# Altium PCB PCB1.PcbDoc
Units mm, origin at the board's own origin, x right, y up, seen from the top; angles counter-clockwise.
Board outline 39.55 x 34.49 mm, 2 copper layers (Top Layer, Bottom Layer); 28 components, 18 nets, 126 pads, 0 vias.
Unrouted connection lines stored in the file: 69.
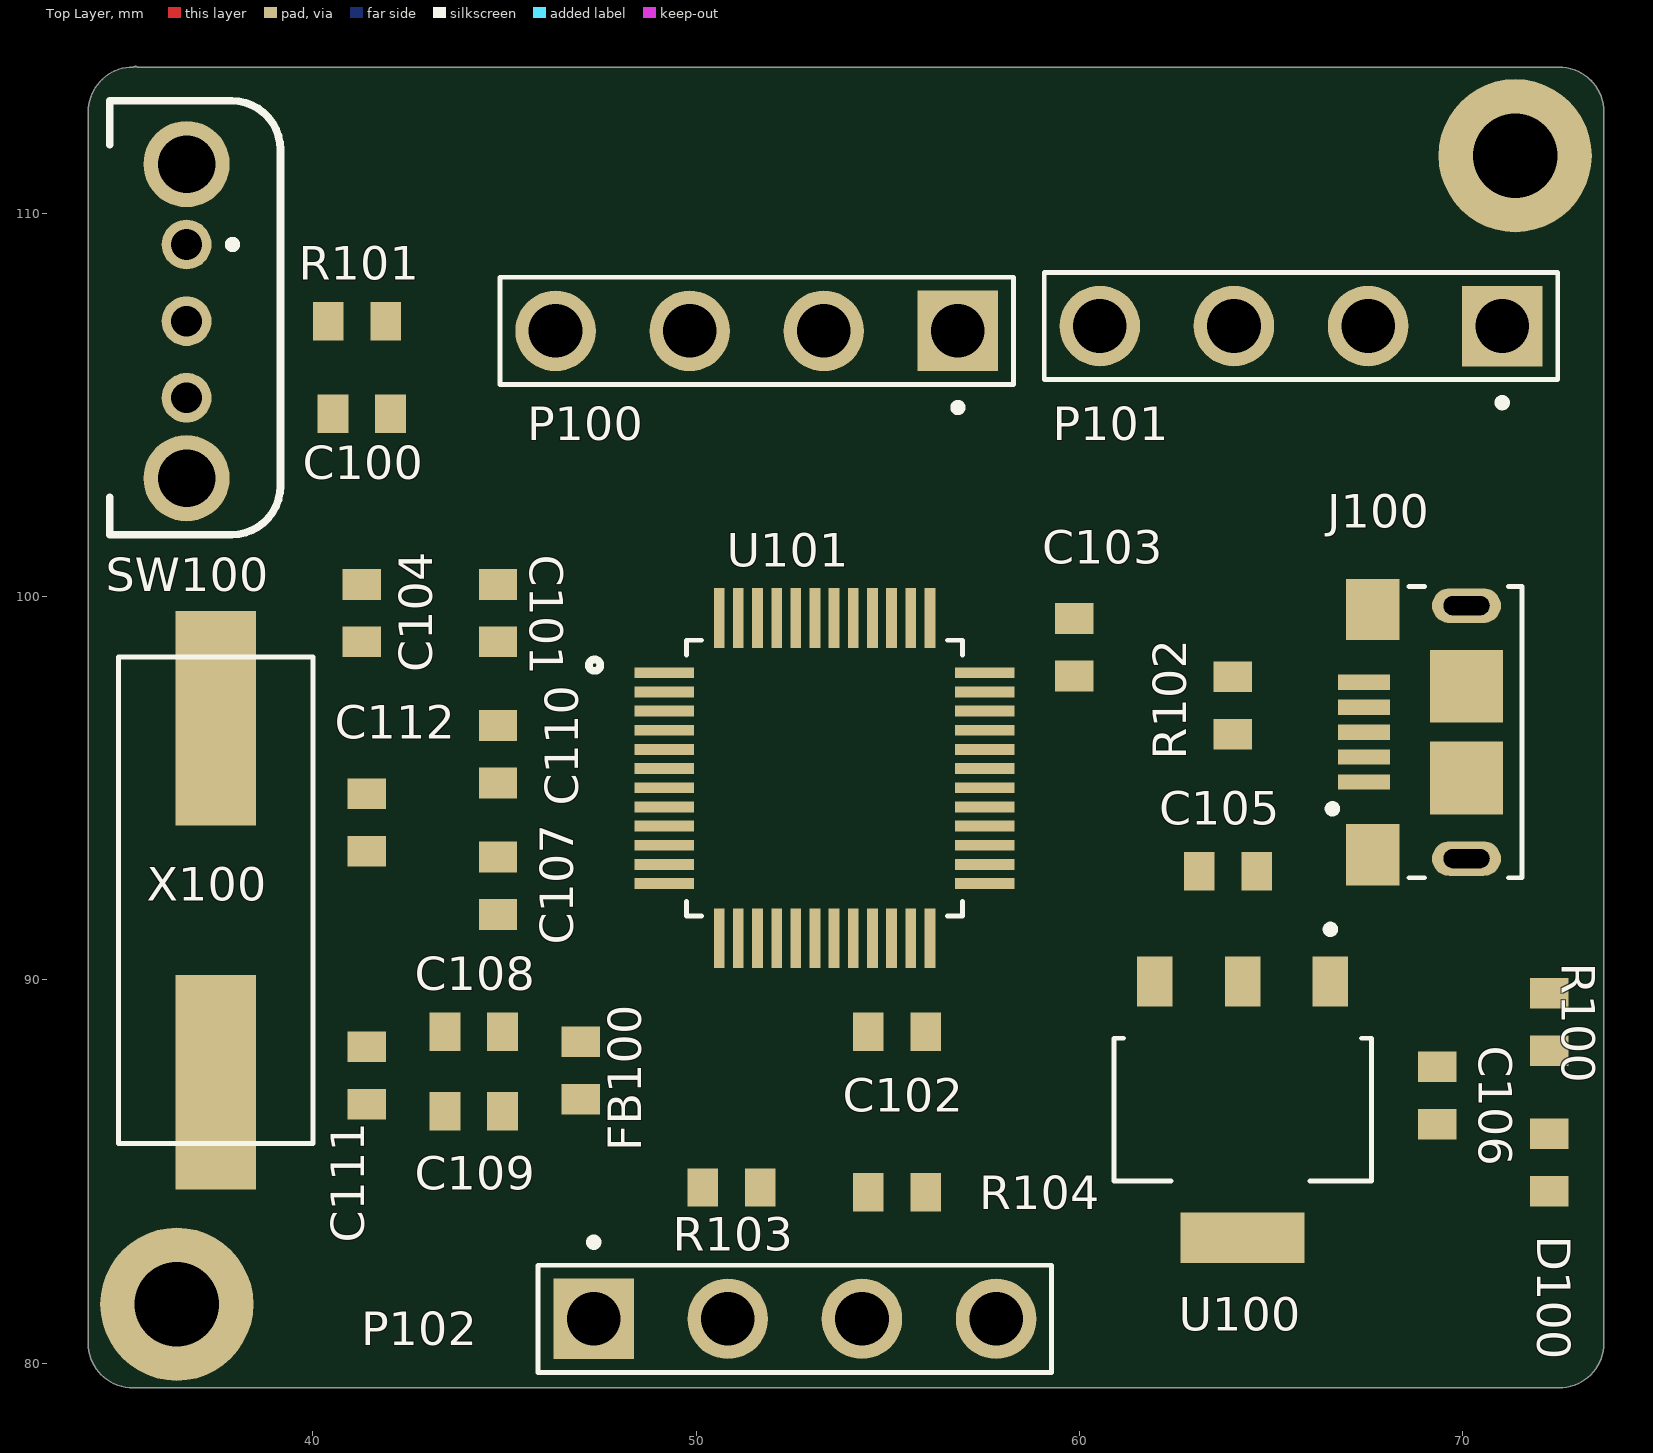
[diagram p0: Top Layer view]
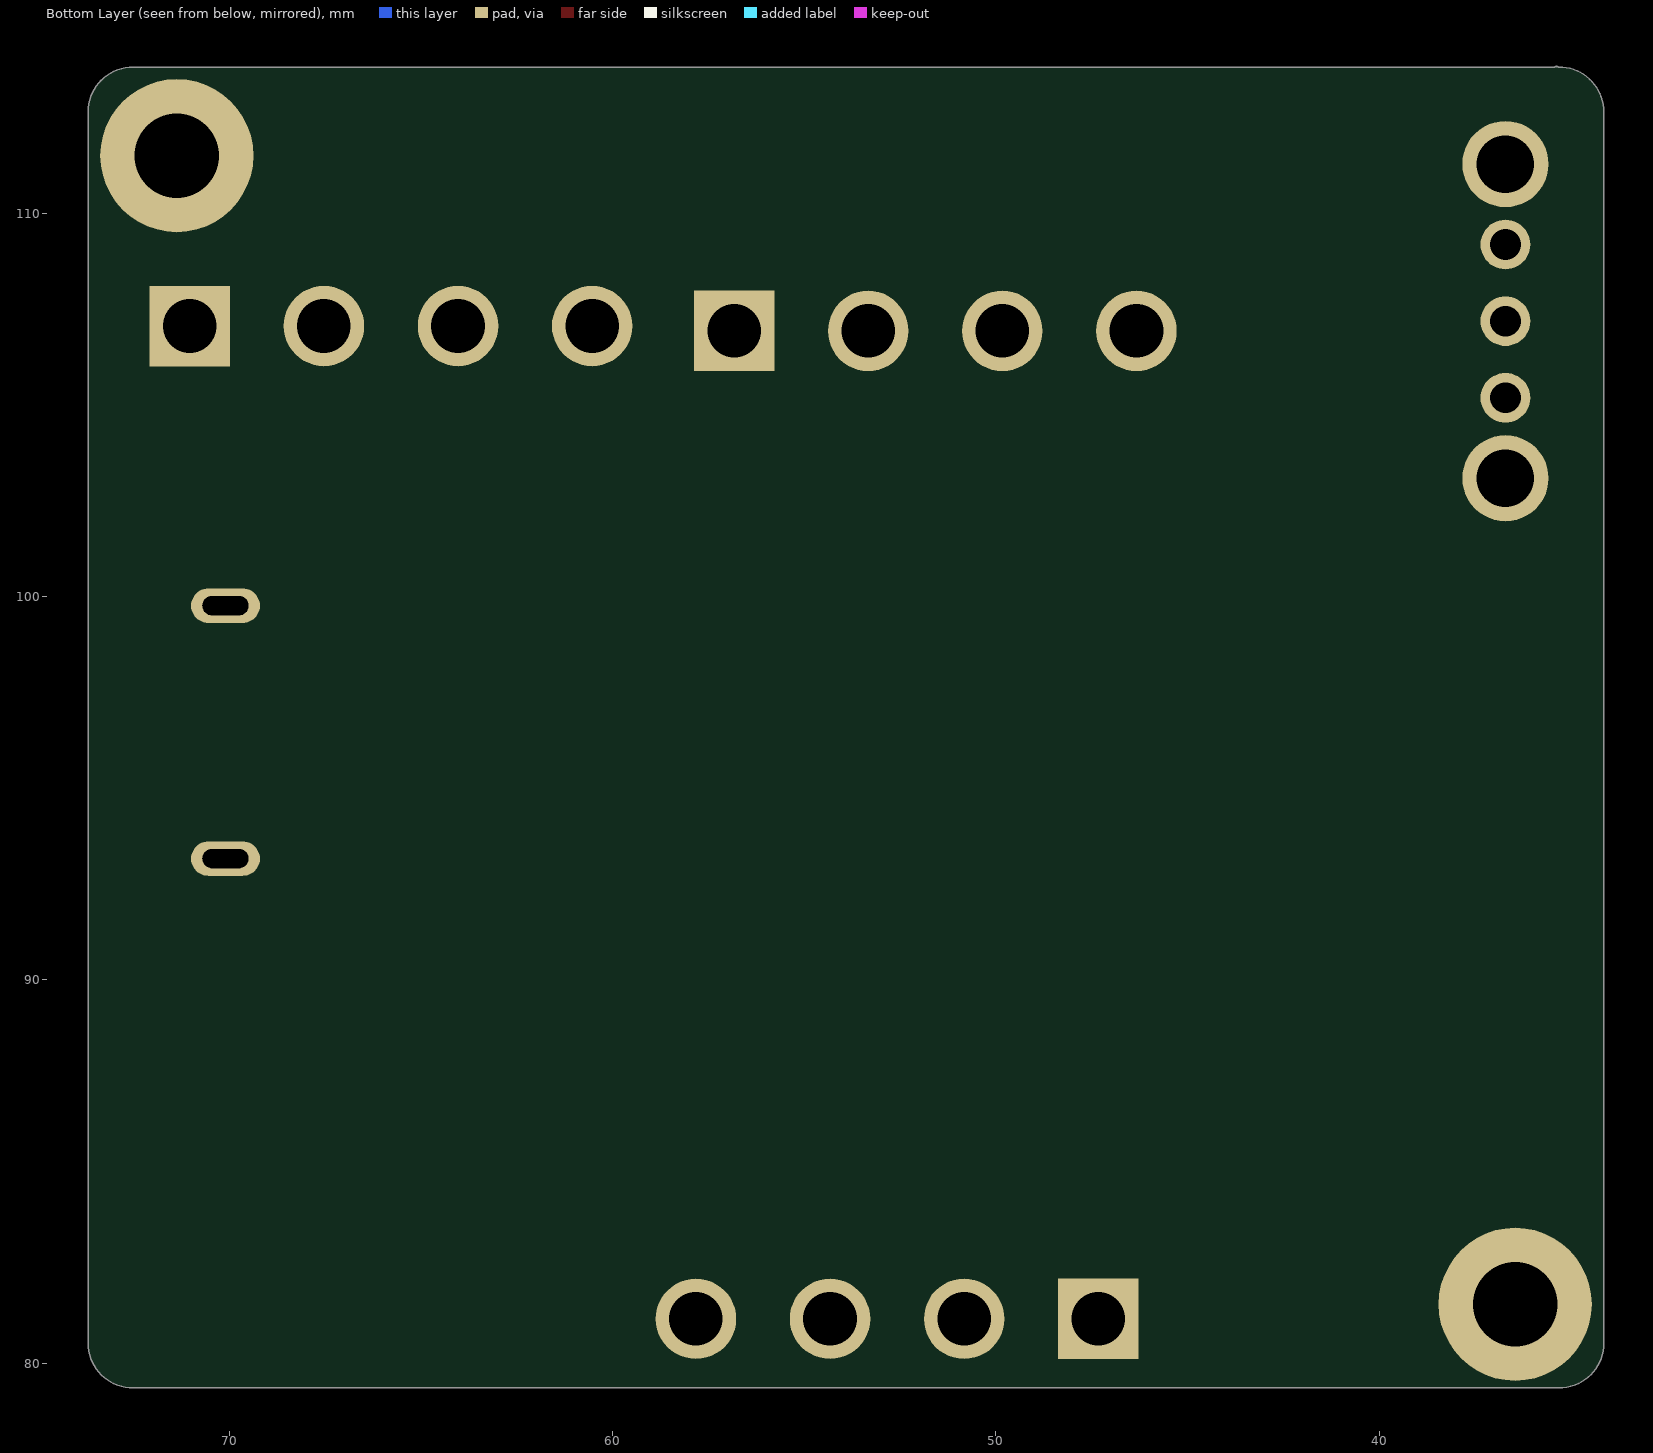
[diagram p1: Bottom Layer view, seen from below]

## Layer stack, top to bottom
Top Solder: solder mask 0.0102, Solder Resist, Dk 3.5
Top Layer: signal copper 0.0356
Dielectric 1: dielectric 0.32, FR-4, Dk 4.8
Bottom Layer: signal copper 0.0356
Bottom Solder: solder mask 0.0102, Solder Resist, Dk 3.5

## Board outline
35.306,79.348 cw(c35.306,80.518) 34.136,80.517 cw(c34.429,80.518) 34.136,80.518 34.136,112.649 cw(c35.306,112.649) 35.306,113.819 ccw(c35.306,113.919) 35.369,113.841 ccw(c35.433,113.919) 35.433,113.819 72.517,113.819 cw(c72.517,112.649) 73.687,112.651 cw(c72.509,112.649) 73.687,112.649 73.687,112.651 73.687,80.518 cw(c72.517,80.518) 72.517,79.348 35.307,79.348 ccw(c35.306,79.248)

## Design rules (kind name [scope] priority, off if disabled: settings)
Clearance [All] p1: gap=0.152 ignorepadtopadclearanceinfootprint=FALSE except(0: Arc-Text Track-Text SMDPad-Text THPad-Text Via-Text Fill-Text Poly-Text Region-Text Text-Text)
PolygonConnect [All] p1: connectstyle=Relief reliefconductorwidth=0.254 reliefentries=4 polygonreliefangle="90 Angle" airgapwidth=0.254
RoutingVias [All] p1: holewidth=0.5 width=0.8 viastyle="Through Hole" minholewidth=0.3 minwidth=0.5 maxholewidth=1 maxwidth=2
SolderMaskExpansion [All] p1: expansion=0.102 istentingtop=FALSE
Width [All] p1: maxlimit=3 minlimit=0.15 preferedwidth=0.15
30 further rules are at their usual default settings.

## Classes and differential pairs
component class Sheet1: C100 C101 C102 C103 C105 C106 C107 C108 C109 C110 C111 C112 D100 FB100 J100 P100 P101 P102 R100 R101 R102 R103 R104 SW100 X100

## Components (designator, comment, footprint, x,y, rotation, side; value= is the part's Value field where it differs from the comment)
C100 "100n" CAP_0603 41.275,104.775 r0 top
C101 "100n" CAP_0603 44.831,99.568 r90 top
C102 "100n" CAP_0603 55.245,88.646 r180 top
C103 "100n" CAP_0603 59.869,98.679 r90 top
C104 "100n" CAP_0603 41.275,99.568 r90 top
C105 "22u" CAP_0603 63.881,92.837 r0 top
C106 "22u" CAP_0603 69.342,86.983 r90 top
C107 "10n" CAP_0603 44.831,92.456 r90 top
C108 "1u" CAP_0603 44.196,88.646 r180 top
C109 "1u" CAP_0603 44.196,86.567 r180 top
C110 "100n" CAP_0603 44.831,95.885 r90 top
C111 "10p" CAP_0603 41.402,87.503 r90 top
C112 "10p" CAP_0603 41.402,94.107 r270 top
D100 "RED" LED_0603_RED 72.263,85.229 r90 top
FB100 "120R" FB_0603 46.99,87.63 r270 top
J100 "USB_B_Micro" USB_B_MICRO 68.766,96.463 r90 top
P100 "Terminal_Block_Header_1" HEADER_4 51.582,106.934 r180 top
P101 "Terminal_Block_Header_1" HEADER_4 65.786,107.061 r180 top
P102 "Terminal_Block_Header_1" HEADER_4 52.578,81.153 r0 top
R100 "1k5" RES_0603 72.263,88.9 r270 top
R101 "10k" RES_0603 41.148,107.188 r0 top
R102 "1k5" RES_0603 64.008,97.155 r90 top
R103 "1k5" RES_0603 50.927,84.582 r180 top
R104 "1k5" RES_0603 55.245,84.455 r0 top
SW100 "Switch" SWITCH 36.703,107.188 r270 top
U100 "Linear Voltage Regulator" AMS1117 64.262,86.614 r270 top
U101 "U?" STM32F103C8TX 53.351,95.262 r0 top (schematic designator STM100)
X100 "16MHz" "Crystal 8MHZ" 37.465,92.075 r90 top

## Footprints (in the part's own frame and the unit in brackets; to place one, negate y for a bottom-side part, rotate by r counter-clockwise, add the part's x,y. Pads: shape width x height; smd on the part's side, far side on the other; paste and mask are expansions set on the pad)
AMS1117 [mm]
  rect 1.31x0.93 smd mask+0.005: 1(-3.345,2.29) 2(-3.345,0) 3(-3.345,-2.29)
  rect 1.31x3.24 smd mask+0.005: 4(3.345,0)
  silkscreen extent -4.8,-3.36 1.86,3.36, body extent -3.4,-3.3 3.6,3.2, height 1.81
CAP_0603 [mm]
  rect 0.8x1 smd: 1(0.75,0) 2(-0.75,0)
  body extent -0.76,-0.4 0.84,0.4, height 0.47
"Crystal 8MHZ" [mil]
  rect 220x83 smd mask+1.97: 1(187,0) 2(-187,0)
  silkscreen extent -250,-100 250,100, body extent -250,-92 250,93, height 160
FB_0603 [mm]
  rect 0.8x1 smd: 1(-0.75,0) 2(0.75,0)
  body extent -0.8,-0.4 0.8,0.4, height 0.81
HEADER_4 [mm]
  rect 2.1x2.1 hole 1.4: 1(-5.25,0)
  round 2.1 hole 1.4: 2(-1.75,0) 3(1.75,0) 4(5.25,0)
  silkscreen extent -6.7,-1.4 6.7,2.1, body extent -6.67,-1.4 6.73,1.4, height 7
LED_0603_RED [mm]
  rect 0.8x1 smd: A(0.75,0) K(-0.75,0)
  body extent -0.8,-0.4 0.8,0.4, height 0.6
RES_0603 [mm]
  rect 0.8x1 smd: 1(-0.75,0) 2(0.75,0)
  body extent -0.8,-0.43 0.8,0.43, height 0.52
STM32F103C8TX [mm]
  rect 1.56x0.28 smd mask+0.005: 1(-4.18,2.75) 2(-4.18,2.25) 3(-4.18,1.75) 4(-4.18,1.25) 5(-4.18,0.75) 6(-4.18,0.25) 7(-4.18,-0.25) 8(-4.18,-0.75) 9(-4.18,-1.25) 10(-4.18,-1.75) 11(-4.18,-2.25) 12(-4.18,-2.75) 25(4.18,-2.75) 26(4.18,-2.25) 27(4.18,-1.75) 28(4.18,-1.25) 29(4.18,-0.75) 30(4.18,-0.25) 31(4.18,0.25) 32(4.18,0.75) 33(4.18,1.25) 34(4.18,1.75) 35(4.18,2.25) 36(4.18,2.75)
  rect 0.28x1.56 smd mask+0.005: 13(-2.75,-4.18) 14(-2.25,-4.18) 15(-1.75,-4.18) 16(-1.25,-4.18) 17(-0.75,-4.18) 18(-0.25,-4.18) 19(0.25,-4.18) 20(0.75,-4.18) 21(1.25,-4.18) 22(1.75,-4.18) 23(2.25,-4.18) 24(2.75,-4.18) 37(2.75,4.18) 38(2.25,4.18) 39(1.75,4.18) 40(1.25,4.18) 41(0.75,4.18) 42(0.25,4.18) 43(-0.25,4.18) 44(-0.75,4.18) 45(-1.25,4.18) 46(-1.75,4.18) 47(-2.25,4.18) 48(-2.75,4.18)
  silkscreen extent -6.15,-3.6 3.6,3.6, body extent -4.5,-4.5 4.5,4.5, height 1.57
SWITCH [mm]
  round 1.3 hole 0.8: 1(-2,0) 2(0,0) 3(2,0)
  round 2.25 hole 1.5: MH(-4.1,0) MH(4.1,0)
  silkscreen extent -5.75,-2 5.57,2.45, body extent -4.3,-6.22 4.3,2.18, height 4.59
USB_B_MICRO [mm]
  rect 0.4x1.35 smd: 1(-1.3,1.338) 2(-0.65,1.338) 3(0,1.338) 4(0.65,1.338) 5(1.3,1.338)
  rect 1.6x1.4 smd: S1(-3.2,1.112) S2(3.2,1.112)
  rect 1.9x1.9 smd: S3(1.2,-1.338) S4(-1.2,-1.338)
  oval 0.9x1.8 hole 0.5 slot 1.2 at 90 deg: S5(-3.3,-1.338) S6(3.3,-1.338)
  round 0.5 hole 0.5 unplated: ""(-3.3,-1.338) ""(3.3,-1.338)
  silkscreen extent -3.8,-2.79 3.8,2.26, body extent -3.87,-4.05 3.99,1.66, height 2.85

## Part data
C100 C101 C102 C103 C104 C105 C106 C107 C108 C109 C110 C111 C112: library part CAP_0603_10V, "Capacitor SMD 0603 10V"
D100: library part LED_0603_RED, "LED 0603 RED SMD"
FB100: library part FB_0603, "Ferrite Bead SMD 0603"
P100 P101 P102: "4 pin Male"
R100 R101 R102 R103 R104: library part RES_0603, "Resistor SMD 0603"
U100: library part AMS1117, "IC-1117 V.REG. 1A 3V3 SOT223 SMD AMS"
U101: library part STM32F103C8TX, "IC MCU 32BIT 64KB FLASH 48LQFP", Case/Package=LQFP, Frequency=72MHz, Manufacturer=STMicroelectronics, Manufacturer Part Number=STM32F103C8T6, Max Operating Temperature=85°C, Max Power Dissipation=363mW, Max Supply Voltage=3.6V, Min Operating Temperature=-40°C, Min Supply Voltage=2V, Package Quantity=1500, Supplier Part Number 1=1447637, Address Bus Width=32b, Category=Microcontrollers, ComponentLink1Description=https://datasheet.ciiva.com/15122/getdatasheetpartid-69880-15122076.pdf?src-supplier=Verical, ComponentLink1URL=https://datasheet.ciiva.com/15122/getdatasheetpartid-69880-15122076.pdf?src-supplier=Verical, ComponentLink2Description=https://datasheet.ciiva.com/8054/1730126-8054942.pdf?src-supplier=Element14, ComponentLink2URL=https://datasheet.ciiva.com/8054/1730126-8054942.pdf?src-supplier=Element14, ComponentLink3Description=https://datasheet.ciiva.com/14100/pustm-arm-microcont-stm32f103-en-14100508.pdf?src-supplier=Distrelec, ComponentLink3URL=https://datasheet.ciiva.com/14100/pustm-arm-microcont-stm32f103-en-14100508.pdf?src-supplier=Distrelec, ComponentLink4Description=https://datasheet.ciiva.com/16210/cd00161566-16210248.pdf?src-supplier=Future+Electronics, ComponentLink4URL=https://datasheet.ciiva.com/16210/cd00161566-16210248.pdf?src-supplier=Future+Electronics, ComponentLink5Description=https://datasheet.ciiva.com/48687/001075658-da-01-en-mcu-64kb-mem-stm32f103c8t6-lqfp-48-stm-48687589.pdf?src-supplier=Conrad, ComponentLink5URL=https://datasheet.ciiva.com/48687/001075658-da-01-en-mcu-64kb-mem-stm32f103c8t6-lqfp-48-stm-48687589.pdf?src-supplier=Conrad, Core Architecture=ARM, Data Bus Width=32b, Density=64KB, Height=1.4mm, Lead Free="Lead Free", Length=7mm, Max Frequency=72MHz, Memory Size=64KB, Memory Type=FLASH, Number of ADC Channels=10, Number of Bits=32, Number of Pins=48, Number of Programmable I/O=48, Number of PWM Channels=1, Number of SPI Channels=2, Number of Timers/Counters=3, Number of I2C Channels=2, Number of I/Os=37, Oscillator Type=Internal, Packaging=Tray, Peripherals="POR,PWM,WDT,DMA,Temp Sensor,I2C", Pricing 1="1=9,00000, 10=8,13000, 25=7,75000, 50=7,60000 (EUR)", Radiation Hardening=No, RAM Size=20KB, Reach SVHC Compliant=Yes, RoHS=Yes, RoHS Compliant=Yes, Series=STM32F103C8, Stock 1=19511, Supplier 1=Farnell, Termination=SMD/SMT, Watchdog Timer=Yes, Weight=0.006349oz, Width=7mm, Interface=I2C,SPI,USB,CAN,USART
X100: library part "Crystal 8MHz", "16MHz SMD Crystal Resonator 10pF ±10ppm ±30ppm -40℃~+85℃ SMD3225-4P Crystals ROHS", Case/Package=SMD/SMT, ESR (Equivalent Series Resistance)=80R, Frequency=8MHz, Frequency Stability=50ppm, Frequency Tolerance=30ppm, Load Capacitance=18pF, Manufacturer=Abracon, Manufacturer Part Number=ABLS-8.000MHZ-B4-T, Max Operating Temperature=70°C, Min Operating Temperature=-20°C, Package Quantity=1000, Supplier Part Number 1=535-10212-1-ND, Category=Crystals, ComponentLink1Description=https://datasheet.ciiva.com/854/abls-854117.pdf?src-supplier=Digi-Key, ComponentLink1URL=https://datasheet.ciiva.com/854/abls-854117.pdf?src-supplier=Digi-Key, ComponentLink2Description=https://datasheet.ciiva.com/854/abls-854118.pdf?src-supplier=Digi-Key, ComponentLink2URL=https://datasheet.ciiva.com/854/abls-854118.pdf?src-supplier=Digi-Key, ComponentLink3Description=https://datasheet.ciiva.com/3175/abls-3175446.pdf?src-supplier=Avnet, ComponentLink3URL=https://datasheet.ciiva.com/3175/abls-3175446.pdf?src-supplier=Avnet, ComponentLink4Description=https://datasheet.ciiva.com/854/abls-854119.pdf?src-supplier=Digi-Key, ComponentLink4URL=https://datasheet.ciiva.com/854/abls-854119.pdf?src-supplier=Digi-Key, ComponentLink5Description=https://datasheet.ciiva.com/4944/abls-44621-4944748.pdf?src-supplier=Mouser, ComponentLink5URL=https://datasheet.ciiva.com/4944/abls-44621-4944748.pdf?src-supplier=Mouser, Depth=4.7mm, Height=0.165inch, Lead Free="Lead Free", Length=11.4mm, Mount="Surface Mount", Packaging="Tape and Reel", Pricing 1="1=0,32000, 10=0,26400, 50=0,23760, 100=0,21120, 500=0,20064 (USD)", Radiation Hardening=No, REACH SVHC=Yes, RoHS=Yes, Series Resistance=80R, Stock 1=865, Supplier 1=Digi-Key, Termination=SMD/SMT, Tolerance=30ppm, Width=0.185inch

## Free pads (board coordinates)
  round 4 hole 2.2: MH(36.449,81.534) MH(71.374,111.506)

## Nets (pads, with @x,y where several pads share a name; then routed paths per layer and width w, separated by ;. In a path a pad name is that pad's centre, name@x,y a point inside that pad or via, vN(x,y) a via of type N, cw(c..) or ccw(c..) an arc to the next point about the centre after c; other vN are vias at no path point)
+3V3: C100.2 C101.2 C102.2 C103.2 C104.2 C106.2 C109.2 D100.A FB100.2 P100.1 P101.1 P102.1 R102.2 R103.2 R104.2 SW100.3 U100.2 U101.1 U101.24 U101.36 U101.48
+3V3A: C107.2 C108.2 FB100.1 U101.9
GND: C100.1 C101.1 C102.1 C103.1 C104.1 C105.1 C106.1 C107.1 C108.1 C109.1 C110.1 C111.1 C112.1 J100.5 P100.4 P101.4 P102.4 pad.MH R100.1 SW100.1 U100.1 U101.8 U101.23 U101.35 U101.47
HSE_IN: C112.2 U101.5 X100.1
HSE_OUT: C111.2 U101.6 X100.2
I2C2_SCL: P102.2 R103.1 U101.21
I2C2_SDA: P102.3 R104.1 U101.22
NetD100_K: D100.K R100.2
NetR101_1: R101.1 SW100.2
NetR101_2: R101.2 U101.44
NRST: C110.2 U101.7
SWCLK: P101.3 U101.37
SWDIO: P101.2 U101.34
USART1_RX: P100.3 U101.43
USART1_TX: P100.2 U101.42
USB_D+: J100.3 R102.1 U101.33
USB_D-: J100.2 U101.32
VBUS: C105.2 J100.1 U100.3
pads on no net: J100. J100.4 J100.S1 J100.S2 J100.S3 J100.S4 J100.S5 J100.S6 SW100.MH U100.4 U101.2 U101.3 U101.4 U101.10 U101.11 U101.12 U101.13 U101.14 U101.15 U101.16 U101.17 U101.18 U101.19 U101.20 U101.25 U101.26 U101.27 U101.28 U101.29 U101.30 U101.31 U101.38 U101.39 U101.40 U101.41 U101.45 U101.46